# EAGLE board Shield (EAGLE 8.0.0)
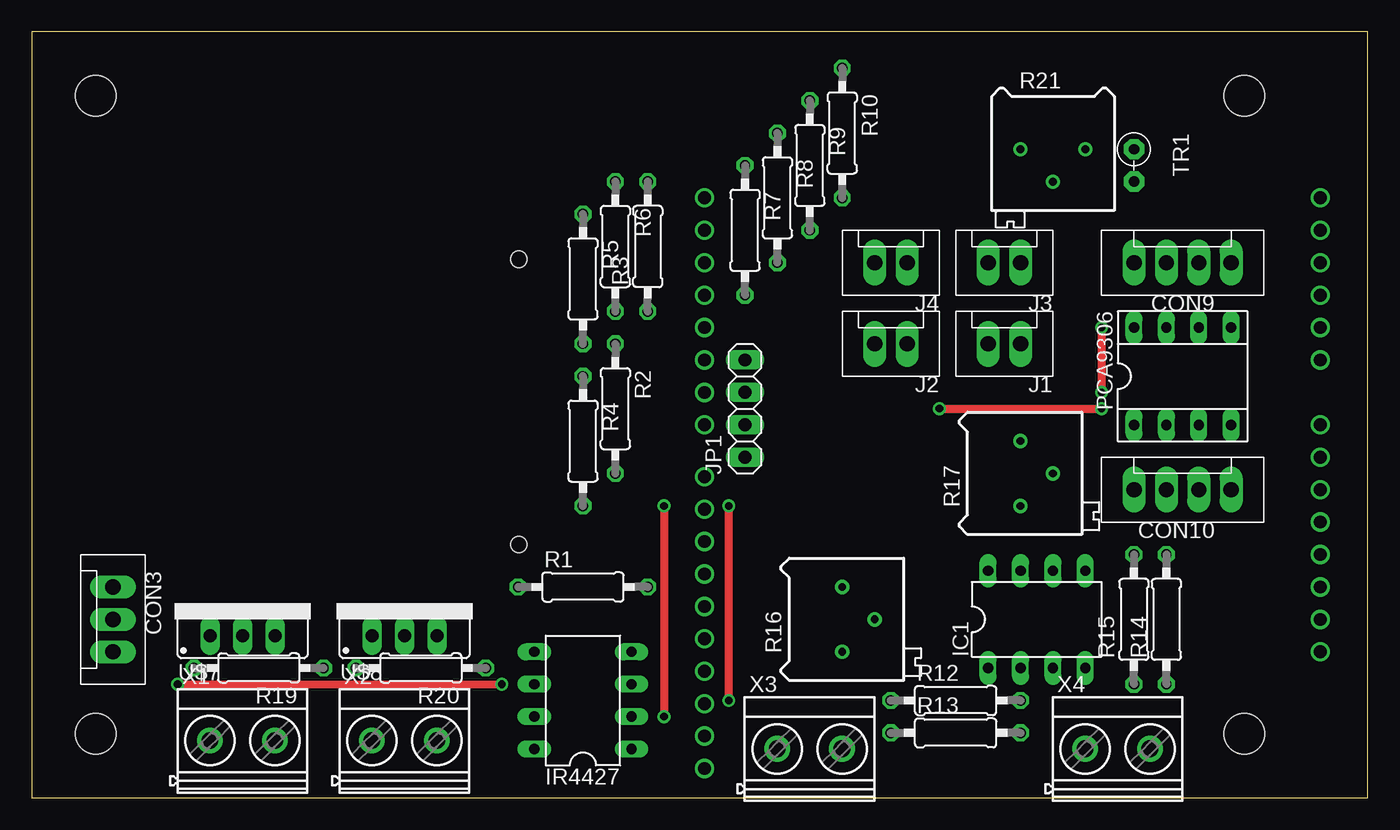
[diagram p0: board, top side]
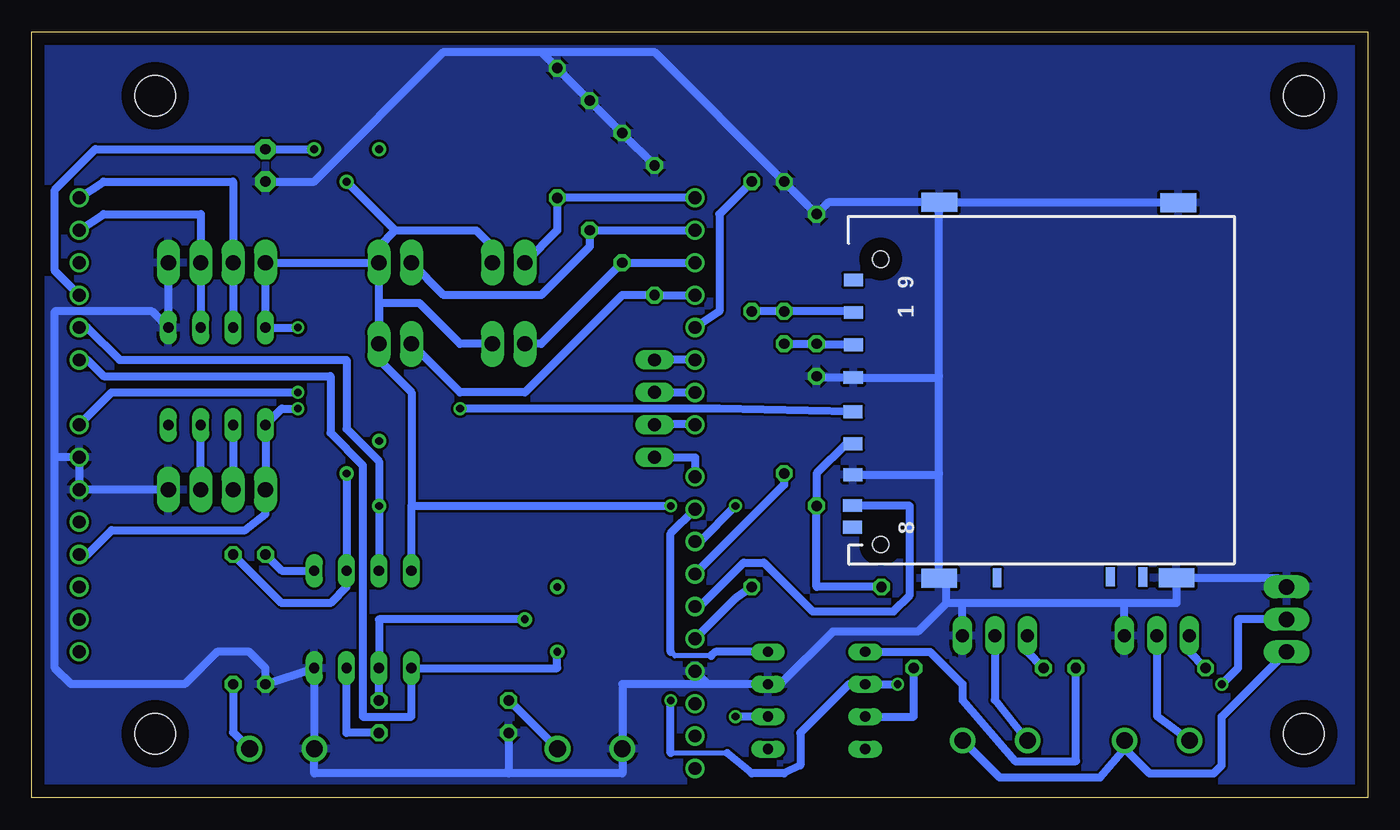
[diagram p1: board, bottom side, seen from below]

Size 104.67 x 59.99 mm. Coordinates in mm from the lower left corner, seen from the top.
Outline: 0,0 104.67,0 104.67,59.99 0,59.99 0,0
Copper layers (1*16): Top 0.035mm / dielectric 1.5mm / Bottom 0.035mm
Design rules "default": minimum track width 10mil, minimum drill 24mil, track to track 8mil, track to pad 8mil, pad to pad 8mil, via to via 8mil, smd to smd 8mil, copper to edge 40mil, drill to drill 8mil, minimum pad ring 10mil, minimum via ring 8mil, stop-mask expansion 4mil, vias tented up to drill 0mil, thermal gap 10mil
Holes 3.2 mm at 5,5 5,55 95,55 95,5

## Footprints (pad centres in the part's own frame; a part is rotated, then mirrored left to right if it is on the bottom)
DM1A-DSF-PEJ = smd 1 x 1.5: 1 6.263,16.174; 2 3.738,16.174; 3 1.161,16.178; 4 -1.516,16.205; 5 -4.016,16.205; 6 -6.44,16.205; 7 -8.865,16.231; 8 -10.565,16.231; 9 8.814,16.174 | smd 1.5 x 0.7: COM_TERM -14.462,-6.502; DETECT -14.532,4.902; WRT_PROT -14.437,-3.988 | smd 1.5 x 2.8: GND1 14.895,9.427; GND2 -14.549,9.452; GND3 -14.523,-9.152; GND4 14.859,-9.305 | hole 1.295: -11.913,14.021; 10.439,14.021
CON3 = drill 1.2 long: P$1 2.54,0; P$2 0,0; P$3 -2.54,0
CON4 = drill 1.2 long: P$1 3.81,0; P$2 1.27,0; P$3 -1.27,0; P$4 -3.81,0
DIL08 = drill 0.813 long: 1 -3.81,-3.81; 2 -1.27,-3.81; 3 1.27,-3.81; 4 3.81,-3.81; 5 3.81,3.81; 6 1.27,3.81; 7 -1.27,3.81; 8 -3.81,3.81
CON2 = drill 1.2 long: P$1 1.27,0; P$2 -1.27,0
1X04 = drill 1.016 long: 1 -3.81,0; 2 -1.27,0; 3 1.27,0; 4 3.81,0
SOCKET-08 = drill 0.813 long: 1 -3.81,-3.81; 2 -1.27,-3.81; 3 1.27,-3.81; 4 3.81,-3.81; 5 3.81,3.81; 6 1.27,3.81; 7 -1.27,3.81; 8 -3.81,3.81
1/4W-H4_(0207/10) = drill 0.813 octagon: 1 -5.08,0; 2 5.08,0
RTRIM64P = drill 0.61: 1 0,-2.54; 2 2.54,0; 3 0,2.54
RS-2,5 = drill 0.813 pad 1.6 octagon: 1 -1.27,0; 2 1.27,0
ARDUINO-SHIELD-PIN-ONLY = drill 1: 3.3V 2.54,-23.495; 5V 5.08,-23.495; A0 17.78,-23.495; A1 20.32,-23.495; A2 22.86,-23.495; A3 25.4,-23.495; A4 27.94,-23.495; A5 30.48,-23.495; AREF -9.144,24.765; D0 30.48,24.765; D1 27.94,24.765; D2 25.4,24.765; D3 22.86,24.765; D4 20.32,24.765; D5 17.78,24.765; D6 15.24,24.765; D7 12.7,24.765; D8 8.636,24.765; D9 6.096,24.765; D10 3.556,24.765; D11 1.016,24.765; D12 -1.524,24.765; D13 -4.064,24.765; GND@1 -6.604,24.765; GND@2 7.62,-23.495; GND@3 10.16,-23.495; IOREF -2.54,-23.495; NC0 -11.684,24.765; NC1 -14.224,24.765; NC2 -5.08,-23.495; RESET 0,-23.495; VIN 12.7,-23.495
TO-220 = drill 1.016 long: 1 -2.54,0; 2 0,0; 3 2.54,0
MKDSN1,5/2-5,08 = drill 1.3 pad 2: 1 -2.561,0.025; 2 2.519,0.025

## Placement (x,y rotation side)
CON1  DM1A-DSF-PEJ  [DM1A-DSF-PEJ]  24.13,31.75 90 bottom
CON3  CON3  [CON3]  6.35,13.97 270 top
CON9  CON4  [CON4]  90.17,41.91 180 top
CON10  CON4  [CON4]  90.17,24.13 180 top
IC1  AD712N  [DIL08]  78.74,13.97 0 top
IR4427  [DIL08]  43.18,7.62 90 top
J1  CON2  [CON2]  76.2,35.56 180 top
J2  CON2  [CON2]  67.31,35.56 180 top
J3  CON2  [CON2]  76.2,41.91 180 top
J4  CON2  [CON2]  67.31,41.91 180 top
JP1  [1X04]  55.88,30.48 90 top
PCA9306  [SOCKET-08]  90.17,33.02 0 top
R1  470  [1/4W-H4_(0207/10)]  43.18,16.51 0 top
R2  470  [1/4W-H4_(0207/10)]  45.72,30.48 270 top
R3  470  [1/4W-H4_(0207/10)]  48.26,43.18 90 top
R4  1k  [1/4W-H4_(0207/10)]  43.18,27.94 270 top
R5  1k  [1/4W-H4_(0207/10)]  43.18,40.64 270 top
R6  1k  [1/4W-H4_(0207/10)]  45.72,43.18 270 top
R7  10k  [1/4W-H4_(0207/10)]  55.88,44.45 270 top
R8  10k  [1/4W-H4_(0207/10)]  58.42,46.99 270 top
R9  10k  [1/4W-H4_(0207/10)]  60.96,49.53 270 top
R10  10k  [1/4W-H4_(0207/10)]  63.5,52.07 270 top
R12  100  [1/4W-H4_(0207/10)]  72.39,7.62 0 top
R13  100  [1/4W-H4_(0207/10)]  72.39,5.08 0 top
R14  100  [1/4W-H4_(0207/10)]  88.9,13.97 90 top
R15  100  [1/4W-H4_(0207/10)]  86.36,13.97 90 top
R16  100k  [RTRIM64P]  63.5,13.97 0 top
R17  100k  [RTRIM64P]  77.47,25.4 0 top
R19  220?  [1/4W-H4_(0207/10)]  17.78,10.16 180 top
R20  220?  [1/4W-H4_(0207/10)]  30.48,10.16 180 top
R21  10k  [RTRIM64P]  80.01,50.8 270 top
TR1  10k(25C)  [RS-2,5]  86.36,49.53 270 top
U$1  ARDUINO-IOPIN  [ARDUINO-SHIELD-PIN-ONLY]  77.47,16.51 90 top
U$7  TO-220(MOS-FET_N)  [TO-220]  16.51,12.7 0 top
U$8  TO-220(MOS-FET_N)  [TO-220]  29.21,12.7 0 top
X1  MKDSN1,5/2-5,08  [MKDSN1,5/2-5,08]  16.51,4.45 0 top
X2  MKDSN1,5/2-5,08  [MKDSN1,5/2-5,08]  29.21,4.45 0 top
X3  MKDSN1,5/2-5,08  [MKDSN1,5/2-5,08]  60.96,3.81 0 top
X4  MKDSN1,5/2-5,08  [MKDSN1,5/2-5,08]  85.09,3.81 0 top

## Library data of the parts
CON1 = (スロット)SDカード
CON3 CON9 CON10 J1-J4 = (コネクタ)XH
IC1 = analog-devices; MF: ALTERA CORPORATION; MPN: AD712JNZ; OC_FARNELL: 9604898; OC_NEWARK: 59K4554
IR4427 PCA9306 = (半導体)汎用DIP
JP1 = (コネクタ)ピンヘッダ
R1-R10 R12-R15 R19 R20 = (Foundation)抵抗
R16 R17 R21 = 0RCL
TR1 = discrete
U$1 = (モジュール)Arduino
U$7 U$8 = (半導体)FET＆トランジスタ
X1-X4 = con-phoenix-508

## Nets
+3.3V: CON1.4 CON10.P$1 PCA9306.1 U$1.3.3V
+5V: CON3.P$2 CON9.P$1 IC1.8 IR4427.6 J1.P$2 J2.P$2 J3.P$2 J4.P$2 PCA9306.8 R21.2 U$1.VIN
+9V: CON3.P$1 X1.2 X2.2
DGND: CON1.3 CON1.6 CON1.GND1 CON1.GND2 CON1.GND3 CON1.GND4 CON3.P$3 CON9.P$4 CON10.P$4 IC1.4 IR4427.3 PCA9306.5 R4.1 R5.1 R6.1 R7.1 R8.1 R9.1 R10.1 R13.1 R15.1 TR1.2 U$1.GND@1 U$1.GND@2 U$1.GND@3 U$7.3 U$8.3 X3.1 X4.1
N$1: CON1.2 R2.1 R5.2
N$2: R1.2 U$1.D13
N$3: CON1.5 R1.1 R4.2
N$4: J1.P$1 R7.2 U$1.D3
N$5: R2.2 U$1.D11
N$6: CON1.1 R3.1 R6.2
N$7: R3.2 U$1.D4
N$8: J2.P$1 R8.2 U$1.D2
N$9: CON1.7 U$1.D12
N$10: J3.P$1 R9.2 U$1.D1
N$11: J4.P$1 R10.2 U$1.D0
N$12: CON10.P$2 PCA9306.2
N$13: CON9.P$3 PCA9306.6 U$1.A4
N$14: CON9.P$2 PCA9306.7 U$1.A5
N$15: CON10.P$3 PCA9306.3
N$16: IC1.2 R12.2 R16.2
N$17: IC1.3 R13.2
N$18: IC1.5 R15.2
N$19: IC1.6 R14.2 R17.2
N$20: IC1.1 R16.1 U$1.A0
N$21: IC1.7 R17.1 U$1.A1
N$22: JP1.4 U$1.D5
N$23: JP1.3 U$1.D6
N$24: JP1.2 U$1.D7
N$25: JP1.1 U$1.D8
N$26: U$7.2 X1.1
N$27: R19.2 U$7.1
N$28: R21.3 TR1.1 U$1.A2
N$29: IR4427.2 U$1.D10
N$30: IR4427.4 U$1.D9
N$31: U$8.2 X2.1
N$32: R20.2 U$8.1
N$33: IR4427.5 R19.1
N$34: IR4427.7 R20.1
N$35: R14.1 X4.2
N$36: R12.1 X3.2

## Tracks (layer width: path | path; a pad name or v marks a point on that pad's centre or on a via)
+3.3V  (via drill 0.6)
  Top 0.61: v71.12,30.48 v83.82,30.48
  Bottom 0.61: U$1.3.3V 100.33,19.05 98.42,20.95 87.95,20.95 86.36,22.23 CON10.P$1 PCA9306.1 85.09,30.48 v83.82,30.48 | CON1.4 50.8,30.48 v71.12,30.48
+5V  (via drill 0.6)
  Top 0.61: v11.43,8.89 v36.83,8.89 | v54.61,7.62 v54.61,22.86 | v83.82,36.83 v83.82,31.75
  Bottom 0.406: 50.16,3.49 54.61,3.49
  Bottom 0.61: J2.P$2 71.12,35.56 74.3,38.73 77.47,38.73 J1.P$2 | J1.P$2 J3.P$2 | J3.P$2 77.47,43.18 76.2,44.45 | 76.2,44.45 69.85,44.45 68.58,43.18 J4.P$2 | J1.P$2 77.47,34.29 74.93,31.75 74.93,22.86 | R21.2 76.2,44.45 | J3.P$2 CON9.P$1 PCA9306.8 v83.82,36.83 | CON3.P$2 10.16,13.97 10.16,10.16 v11.43,8.89 | v36.83,8.89 IR4427.6 40.64,8.89 44.45,5.08 44.45,2.54 45.72,1.91 48.26,1.91 50.16,3.49 | 54.61,3.49 v54.61,7.62 | IC1.8 74.93,22.86 | 74.93,22.86 v54.61,22.86 | U$1.VIN 98.42,31.75 v83.82,31.75
+9V
  Bottom 0.61: X2.2 28.85,1.59 20.95,1.59 19.03,3.83 | 19.03,3.83 X1.2 | 19.03,3.83 17.1,1.91 12.06,1.91 11.43,2.54 11.43,6.35 CON3.P$1
DGND
  Bottom 0.61: CON1.GND4 33.52,46.61 CON1.GND1 34.29,46.65 | 34.29,46.65 42.26,46.65 R5.1 R6.1 55.88,58.42 64.77,58.42 | 19.05,15.24 14.98,15.24 CON1.GND3 7.07,17.23 CON3.P$3 | 19.05,15.24 31.75,15.24 | 31.75,15.24 33.02,15.24 | 33.02,15.24 33.02,17.2 CON1.GND2 33.58,25.4 | U$8.3 31.75,15.24 | U$7.3 19.05,15.24 | 33.58,25.4 33.58,33.02 | 33.58,33.02 33.58,45.94 34.29,46.65 | 33.58,33.02 33.69,32.91 CON1.3 43.07,32.91 R4.1 | CON1.6 33.67,25.31 33.58,25.4 | 51.69,8.89 IR4427.3 46.04,8.89 41.91,13.02 35.24,13.02 33.02,15.24 | 51.69,8.89 U$1.GND@1 | 51.69,8.89 58.4,8.89 X3.1 58.4,1.91 67.31,1.91 | 67.31,1.91 82.55,1.91 82.55,3.83 X4.1 82.53,10.14 IC1.4 R15.1 86.36,10.16 87.63,11.43 90.17,11.43 92.71,8.89 101.6,8.89 102.87,10.16 102.87,26.67 | R13.1 67.31,1.91 | CON9.P$4 PCA9306.5 95.25,38.1 102.87,38.1 102.87,26.67 | CON10.P$4 U$1.GND@2 U$1.GND@3 102.87,26.67 | TR1.2 82.55,48.26 72.39,58.42 64.77,58.42 | R10.1 R9.1 | R9.1 R8.1 R7.1 | R9.1 64.77,58.42
  pour Bottom: 0,59.69 104.78,59.69 104.78,0 0,0
N$1
  Bottom 0.61: CON1.2 43.11,35.49 R5.2 R2.1
N$2
  Bottom 0.61: R1.2 49.53,15.62 U$1.D13
N$3
  Bottom 0.61: CON1.5 40.85,27.73 43.18,25.4 R4.2 43.18,16.51 R1.1
N$4
  Bottom 0.61: J1.P$1 71.12,31.75 66.04,31.75 58.42,39.37 R7.2 U$1.D3
N$5
  Bottom 0.61: R2.2 45.72,24.51 U$1.D11
N$6
  Bottom 0.61: CON1.1 40.39,38.1 R6.2 R3.1
N$7
  Bottom 0.61: R3.2 50.8,45.72 50.8,38.1 U$1.D4
N$8
  Bottom 0.61: J2.P$1 64.77,35.56 R8.2 U$1.D2
N$9
  Bottom 0.61: U$1.D12 52.32,14.99 48.9,18.41 47.31,18.41 43.5,14.61 37.15,14.61 35.88,15.88 35.88,22.86 40.34,22.86 CON1.7
N$10
  Bottom 0.61: J3.P$1 72.39,39.37 64.77,39.37 60.96,43.18 R9.2 U$1.D1
N$11
  Bottom 0.61: J4.P$1 63.5,44.45 R10.2 U$1.D0
N$12
  Bottom 0.61: PCA9306.2 CON10.P$2
N$13
  Bottom 0.61: PCA9306.6 CON9.P$3 91.44,45.72 99.06,45.72 U$1.A4
N$14
  Bottom 0.61: PCA9306.7 CON9.P$2 88.9,48.26 99.06,48.26 U$1.A5
N$15
  Bottom 0.61: CON10.P$3 PCA9306.3
N$16
  Bottom 0.61: R12.2 IC1.2 77.47,13.97 R16.2
N$17
  Bottom 0.61: R13.2 80.01,5.08 IC1.3
N$18
  Bottom 0.61: R15.2 85.09,17.78 IC1.5
N$19
  Bottom 0.61: R17.2 IC1.6 80.01,16.51 81.28,15.24 85.09,15.24 R14.2
N$20
  Bottom 0.61: R16.1 63.5,10.16 IC1.1 74.93,6.35 78.74,6.35 78.74,26.04 81.28,28.57 81.28,33.02 99.06,33.02 100.33,34.29 U$1.A0
N$21
  Bottom 0.61: IC1.7 R17.1 77.47,26.35 80.01,28.89 80.01,34.29 97.79,34.29 100.33,36.83 U$1.A1
N$22
  Bottom 0.61: U$1.D5 JP1.4
N$23
  Bottom 0.61: JP1.3 U$1.D6
N$24
  Bottom 0.254: 52.81,29.26 U$1.D7 | 55.78,29.26 JP1.2
  Bottom 0.61: 52.81,29.26 55.88,29.26 JP1.2
N$25
  Bottom 0.61: JP1.1 52.7,26.67 U$1.D8
N$26
  Bottom 0.61: U$7.2 16.51,6.4 X1.1
N$27
  Bottom 0.61: R19.2 13.97,11.43 U$7.1
N$28
  Bottom 0.61: U$1.A2 102.87,41.27 102.87,47.62 99.69,50.8 TR1.1 R21.3
N$29  (via drill 0.6)
  Top 0.61: v49.53,22.86 v49.53,6.35
  Bottom 0.61: U$1.D10 52.32,20.07 v49.53,22.86 | IR4427.2 v49.53,6.35
N$30
  Bottom 0.406: 51.44,11.11 54.29,11.11 54.61,11.43
  Bottom 0.61: IR4427.4 51.12,11.43 51.44,11.11 | 54.61,11.43 54.61,20.7 U$1.D9
N$31
  Bottom 0.61: U$8.2 29.21,7.67 X2.1
N$32
  Bottom 0.61: R20.2 26.67,11.43 U$8.1
N$33
  Bottom 0.61: IR4427.5 34.29,11.43 31.75,8.89 31.75,7.62 27.62,2.86 22.86,2.86 R19.1
N$34
  Bottom 0.61: IR4427.7 35.56,6.35 R20.1
N$35
  Bottom 0.61: R14.1 88.9,5.13 X4.2
N$36
  Bottom 0.61: R12.1 67.26,7.62 X3.2